# Altium PCB ATT-Light.PcbDoc (part 1 of 2)
Units mm, origin at the board's own origin, x right, y up, seen from the top; angles counter-clockwise.
Board outline 140.3 x 94.24 mm, 2 copper layers (Top Layer, Bottom Layer); 125 components, 78 nets, 490 pads, 126 vias.
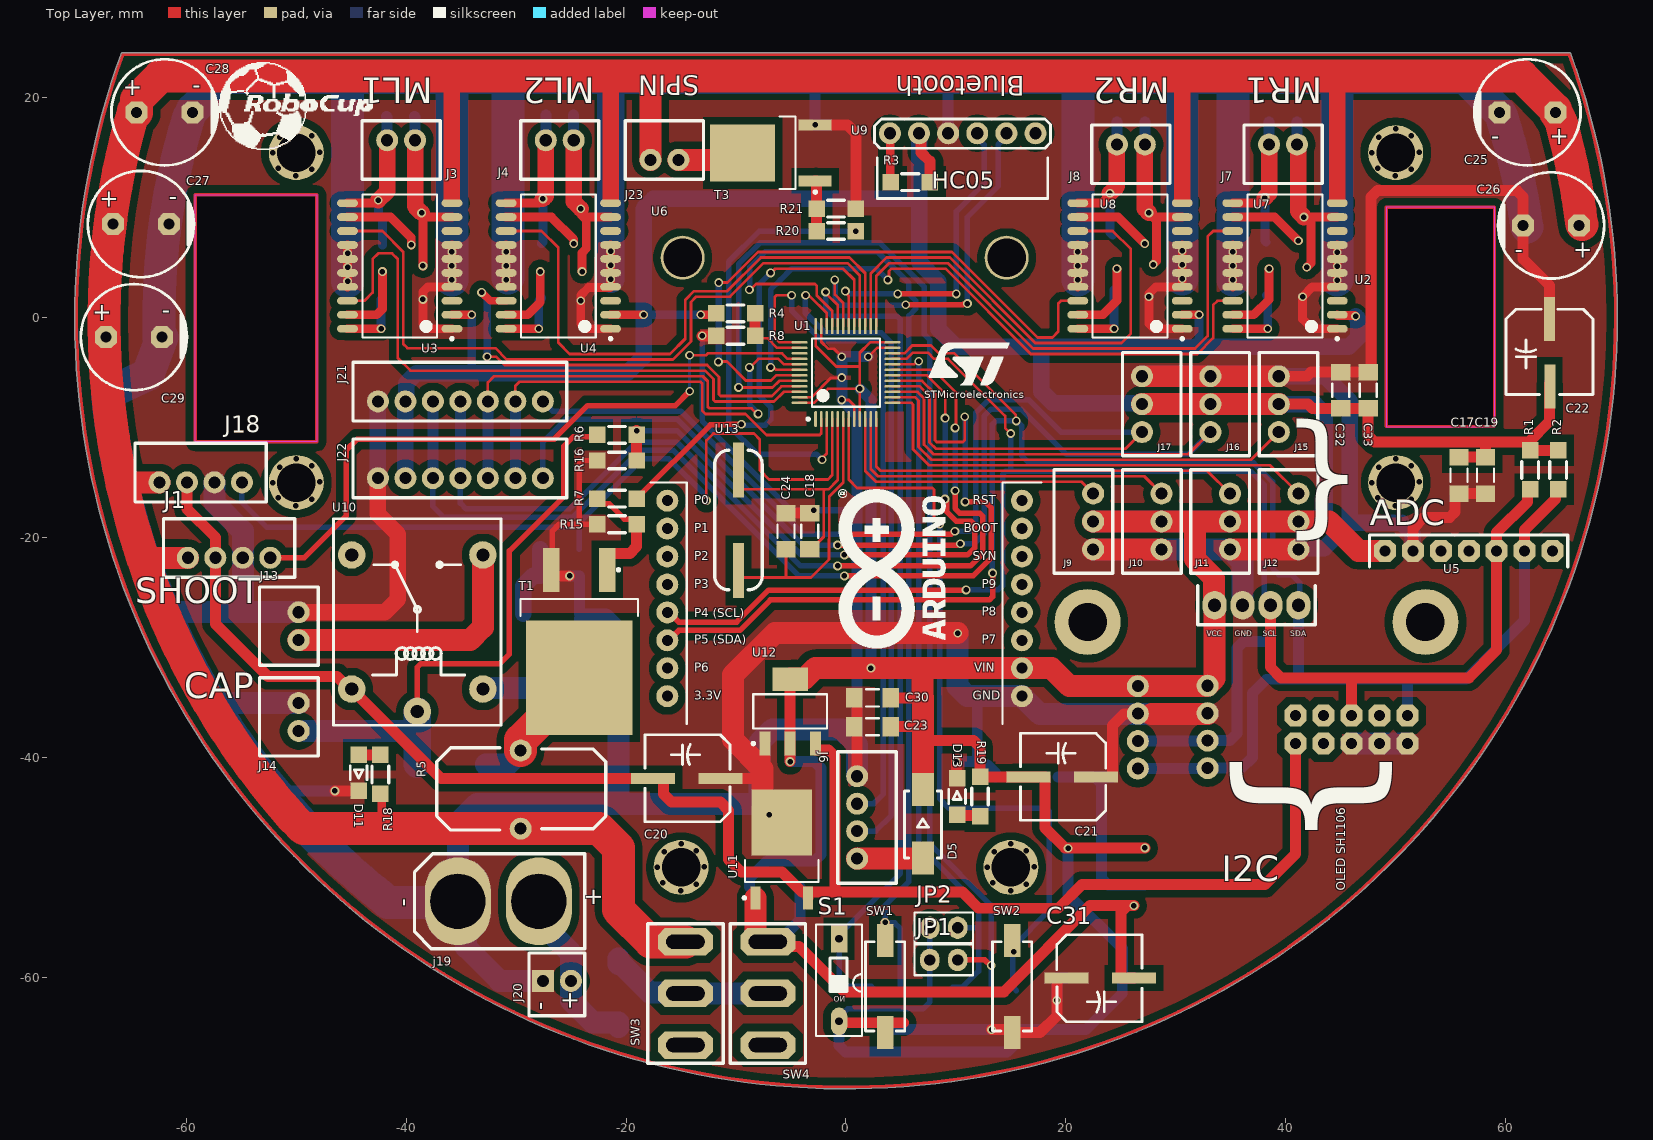
[diagram p0: Top Layer view]
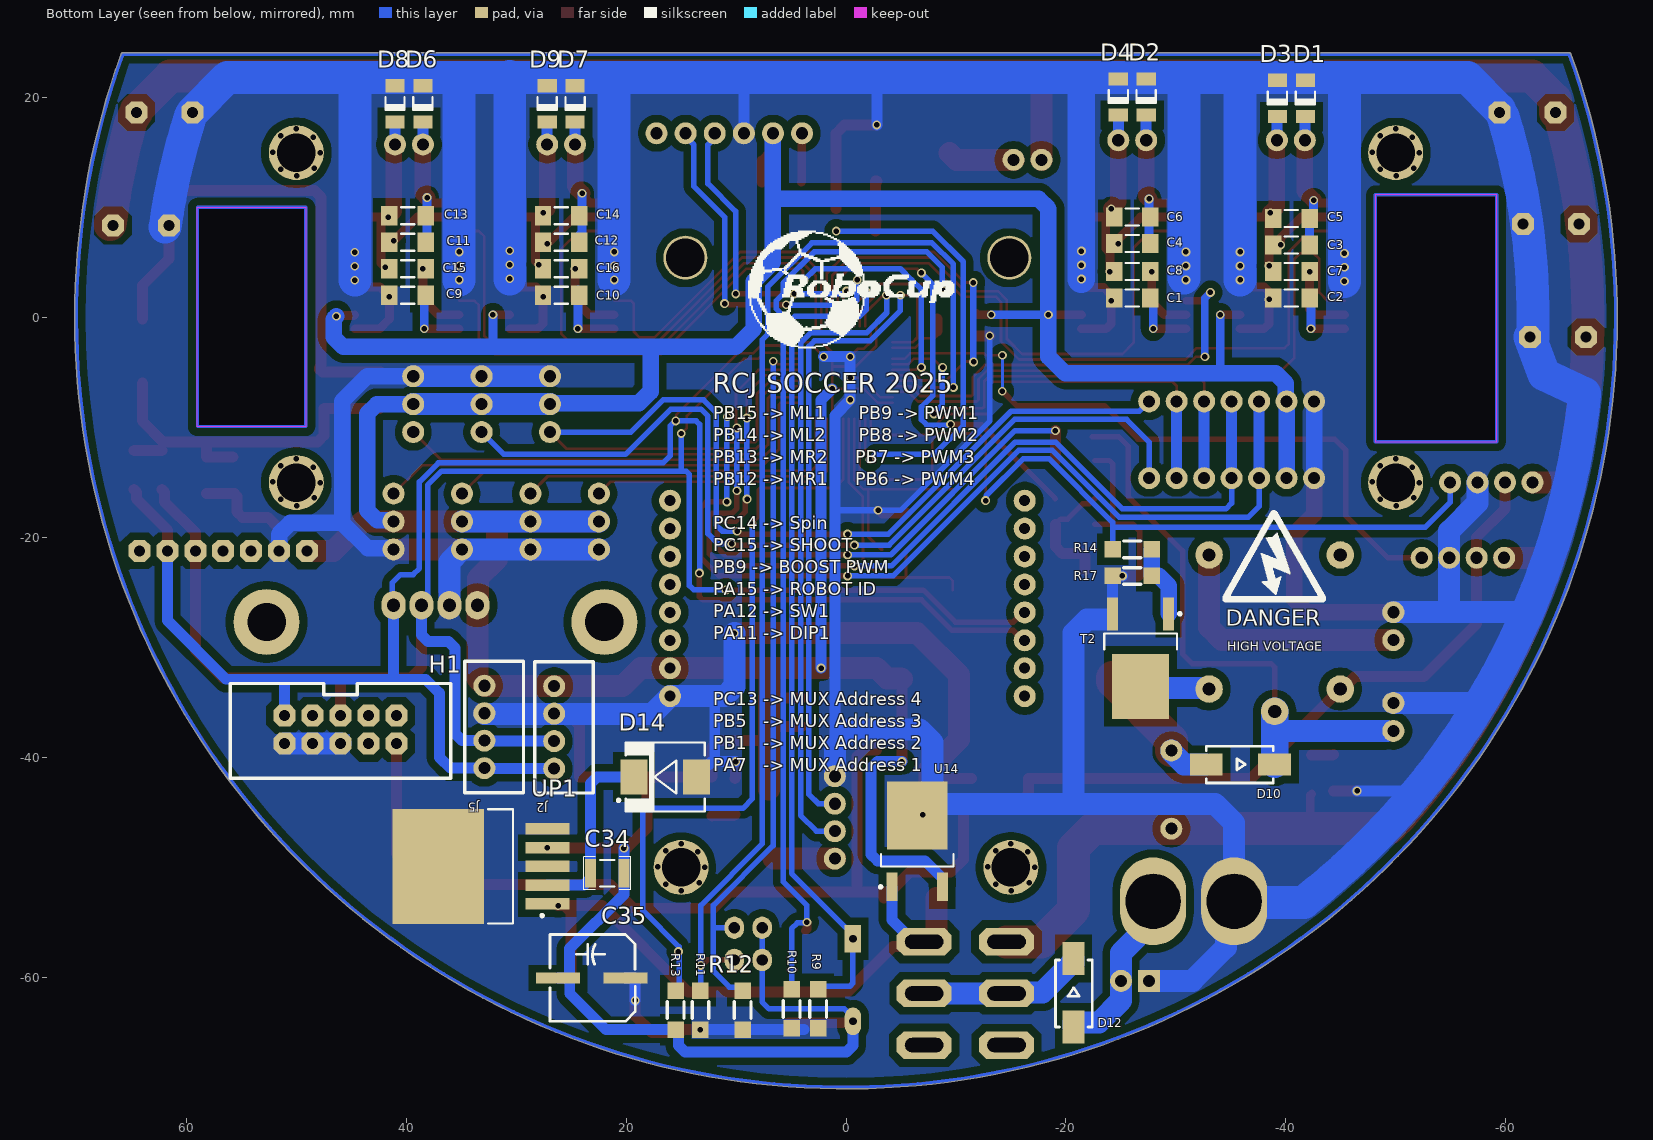
[diagram p1: Bottom Layer view, seen from below]
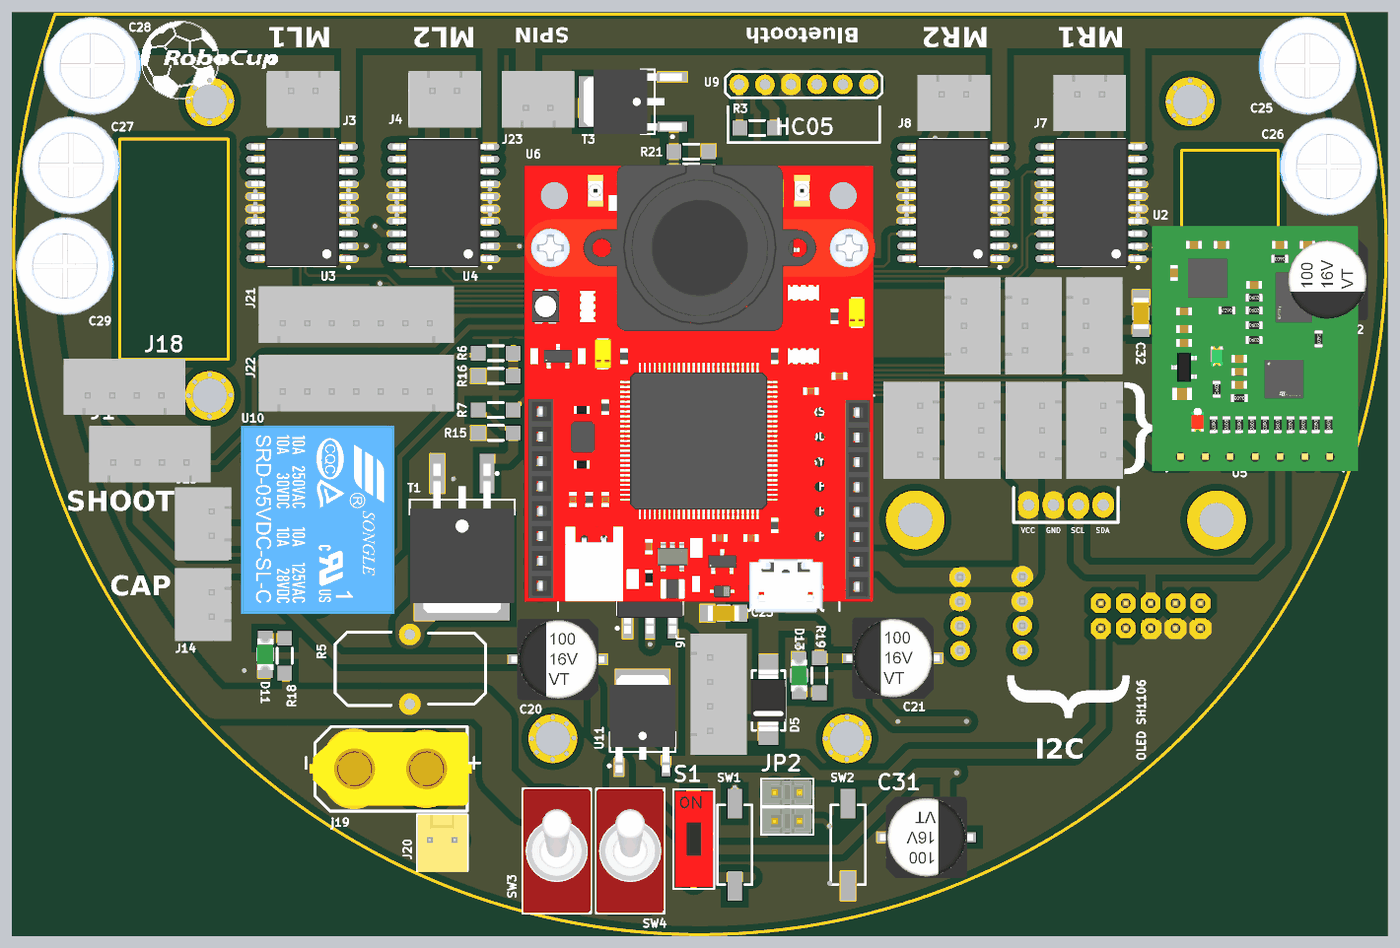
[diagram p3: 3D render of the assembled board from above, using the file's embedded part models]
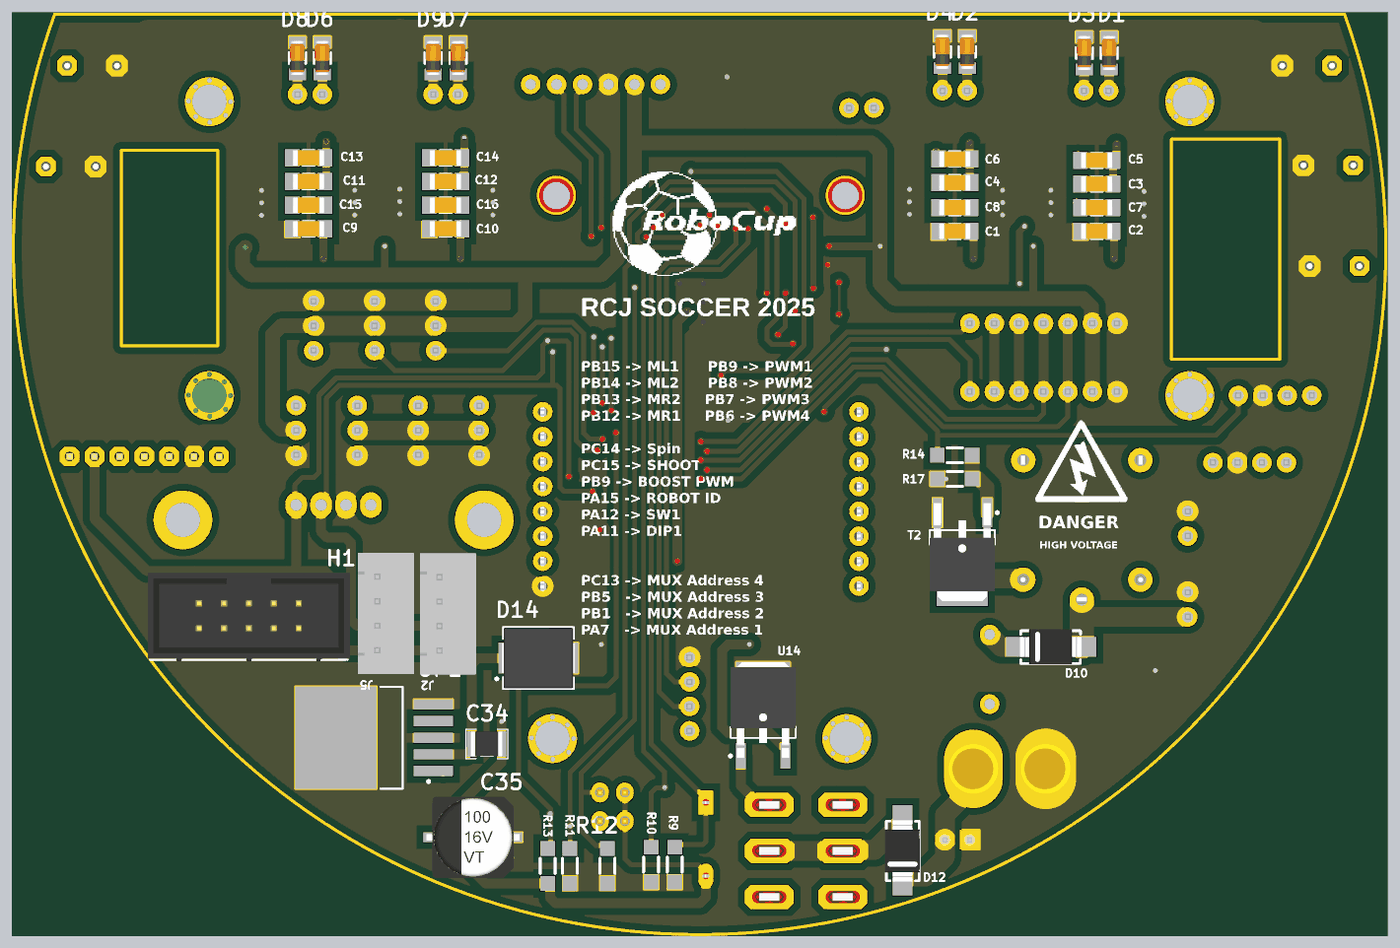
[diagram p4: 3D render of the assembled board from below, using the file's embedded part models]

## Layer stack, top to bottom
Top Solder: solder mask 0.0102, Solder Resist, Dk 3.5
Top Layer: signal copper 0.0356
Dielectric 1: dielectric 0.32, FR-4, Dk 4.8
Bottom Layer: signal copper 0.0356
Bottom Solder: solder mask 0.0102, Solder Resist, Dk 3.5

## Board outline
-65.92,23.993 ccw(c0,0) 70.15,0 ccw(c0,0) 65.92,23.993 ccw(c65.778,23.941) 65.778,24.092 -65.778,24.092 ccw(c-65.778,23.941)
cut-out: 49.149,-9.906 58.987,-9.906 58.987,10.033 49.149,10.033
cut-out: -59.182,-11.303 -59.182,11.176 -48.133,11.176 -48.133,-11.303

## Design rules (kind name [scope] priority, off if disabled: settings)
Clearance [All] p1: gap=0.7 ignorepadtopadclearanceinfootprint=FALSE except(0: Arc-Hole Track-Hole SMDPad-Hole THPad-Hole Via-Hole Fill-Hole Poly-Hole Region-Hole Text-Hole; 0.25: Arc-Arc Arc-Track Arc-SMDPad Track-Track Track-SMDPad SMDPad-SMDPad; 0.254: Arc-THPad Arc-Via Arc-Text Track-THPad Track-Via Track-Text SMDPad-THPad SMDPad-Via SMDPad-Text THPad-THPad THPad-Via THPad-Text Via-Via Via-Text Fill-Text Poly-Text Region-Text Text-Text)
ComponentClearance [All] p1 off: gap=0.254 collisioncheckmode=3 verticalgap=0.254 showdistances=FALSE
Height [All] p1 off: minheight=0 maxheight=25.4 prefheight=12.7
PlaneConnect [All] p1: planeconnectstyle=Direct reliefexpansion=0.508 reliefentries=4 reliefconductorwidth=0.254 reliefairgap=0.254
PolygonConnect [All] p1: connectstyle=Direct reliefconductorwidth=0.254 reliefentries=4 polygonreliefangle="90 Angle" airgapwidth=0.254
RoutingVias [All] p1: holewidth=0.5 width=0.8 viastyle="Through Hole" minholewidth=0.5 minwidth=0.5 maxholewidth=0.5 maxwidth=1
SolderMaskExpansion [All] p1: expansion=0.102 istentingtop=FALSE
SupplyNets "Schematic Supply Nets_3" [InNet('+5')] p1: voltage=0.000
SupplyNets "Schematic Supply Nets_2" [InNet('VCC')] p2: voltage=0.000
SupplyNets "Schematic Supply Nets_1" [InNet('+12')] p3: voltage=0.000
SupplyNets "Schematic Supply Nets" [InNet('GND')] p4: voltage=0.000
Width [All] p1: maxlimit=5 minlimit=0.25 preferedwidth=1
27 further rules are at their usual default settings.

## Classes and differential pairs
component class ATT-Light: C1 C2 C3 C4 C5 C6 C7 C8 C9 C10 C11 C12 C13 C14 C15 C16 C17 C18 C19 C20 C21 C22 C23 C24 C25 C26 C27 C28 C29 C30 C31 C32 C33 C34 C35 D1 D2 D3 D4 D5 D6 D7 D8 D9 D10 D11 D12 D13 D14 H1 J1 J2 J3 J4 J5 J6 J7 J8 J9 J10 J11 J12 J13 J14 J15 J16 J17 J18 j19 J20 J21 J22 J23 JP1 JP2 R1 R2 R3 R4 R5 R6 R7 R8 R10 R11 R12 R13 R14 R15 R16 R17 R18 R19 R20 R21 S1 SW2 SW4 T1 T2 T3 U1 U2 U3 U4 U5 U6 U7 U8 U9 U10 U11 U12 U13 U14 UP1

## Components (designator, comment, footprint, x,y, rotation, side; value= is the part's Value field where it differs from the comment)
C1 "100nF" CAP1206 -26.035,1.778 r0 bottom locked
C2 "100nF" CAP1206 -40.513,1.778 r0 bottom locked
C3 "100nF" CAP1206 -40.513,6.604 r180 bottom locked
C4 "100nF" CAP1206 -26.035,6.731 r180 bottom locked
C5 "100nF" CAP1206 -40.513,9.017 r180 bottom locked
C6 "100nF" CAP1206 -26.035,9.144 r180 bottom locked
C7 "100nF" CAP1206 -40.513,4.191 r180 bottom locked
C8 "100nF" CAP1206 -26.035,4.191 r180 bottom locked
C9 "100nF" CAP1206 39.878,2.032 r0 bottom locked
C10 "100nF" CAP1206 25.908,2.032 r0 bottom locked
C11 "100nF" CAP1206 39.878,6.858 r180 bottom locked
C12 "100nF" CAP1206 25.908,6.858 r180 bottom locked
C13 "100nF" CAP1206 39.878,9.271 r180 bottom locked
C14 "100nF" CAP1206 25.908,9.271 r180 bottom locked
C15 "100nF" CAP1206 39.878,4.445 r180 bottom locked
C16 "100nF" CAP1206 25.908,4.445 r180 bottom locked
C17 "CAP" CAP1206 55.753,-14.351 r90 top
C18 "CAP" CAP1206 -3.302,-19.431 r90 top locked
C19 "CAP" CAP1206 58.166,-14.351 r90 top
C20 "CAP" "CAP SMD 100uF 16V" -14.478,-41.91 r180 top locked
C21 "CAP" "CAP SMD 100uF 16V" 19.685,-41.783 r180 top locked
C22 "CAP" "CAP SMD 100uF 16V" 64.008,-3.175 r270 top
C23 "CAP" CAP1206 2.413,-37.211 r0 top locked
C24 "CAP" CAP1206 -5.461,-19.431 r90 top locked
C25 "1000uF" "CAP 5x10x13 black" 61.976,18.669 r0 top locked
C26 "1000uF" "CAP 5x10x13 black" 64.135,8.382 r0 top locked
C27 "1000uF" "CAP 5x10x13 black" -64.135,8.509 r180 top locked
C28 "1000uF" "CAP 5x10x13 black" -61.976,18.669 r180 top locked
C29 "1000uF" "CAP 5x10x13 black" -64.77,-1.778 r180 top locked
C30 "CAP" CAP1206 2.413,-34.586 r0 top locked
C31 "CAP" "CAP SMD 100uF 16V" 23.114,-60.071 r0 top
C32 "CAP" CAP1206 44.994,-6.604 r270 top locked
C33 "CAP" CAP1206 47.498,-6.604 r270 top locked
C34 "100 UH (1210)" IND1210 21.717,-50.546 r180 bottom value=1u
C35 "CAP" "CAP SMD 100uF 16V" 23.114,-60.071 r0 bottom
D1 "1N4148" "Diode 1n4148 SMD" -41.783,21.588 r270 bottom
D2 "1N4148" "Diode 1n4148 SMD" -27.305,21.715 r270 bottom
D3 "1N4148" "Diode 1n4148 SMD" -39.243,21.588 r270 bottom
D4 "1N4148" "Diode 1n4148 SMD" -24.765,21.715 r270 bottom
D5 "DIODE" Diode 6.985,-46.101 r90 top locked
D6 "1N4148" "Diode 1n4148 SMD" 38.481,21.08 r270 bottom
D7 "1N4148" "Diode 1n4148 SMD" 24.638,21.08 r270 bottom
D8 "1N4148" "Diode 1n4148 SMD" 41.021,21.08 r270 bottom
D9 "1N4148" "Diode 1n4148 SMD" 27.178,21.08 r270 bottom
D10 "DIODE" Diode -35.814,-40.64 r180 bottom locked
D11 "LED" "LED GREEN 1206" -44.323,-41.402 r270 top
D12 "DIODE" Diode -20.701,-61.468 r90 bottom locked
D13 "LED" "LED GREEN 1206" 10.109,-43.561 r90 top locked
D14 "1n5822" DO-214AB(SMC) 16.439,-41.783 r0 bottom
H1 "IDC" "IDC 5x2" 45.847,-37.846 r0 bottom
J1 "XH4" "XH 4PIN" -56.111,-20.955 r0 top
J2 "XH4" "XH 4PIN" 25.654,-37.274 r270 bottom
J3 "XH2" "XH 2pin" -40.462,15.24 r180 top locked
J4 "XH2" "XH 2pin" -26.035,15.24 r180 top locked
J5 "XH4" "XH 4PIN" 32.004,-37.234 r270 bottom
J6 "XH4" "XH 4PIN" 1.905,-45.466 r270 top locked
J7 "XH2" "XH 2pin" 39.751,14.859 r180 top
J8 "XH2" "XH 2pin" 25.908,14.859 r180 top locked
J9 "XH3" "XH 3PIN" 21.59,-18.542 r90 top locked
J10 "XH3" "XH 3PIN" 27.813,-18.542 r90 top locked
J11 "XH3" "XH 3PIN" 34.036,-18.542 r90 top locked
J12 "XH3" "XH 3PIN" 40.259,-18.542 r90 top locked
J13 "XH2" "XH 2pin" -50.673,-28.067 r90 top
J14 "XH2" "XH 2pin" -50.673,-36.322 r90 top
J15 "XH3" "XH 3PIN" 40.251,-7.874 r270 top locked
J16 "XH3" "XH 3PIN" 34.03,-7.874 r270 top locked
J17 "XH3" "XH 3PIN" 27.81,-7.874 r270 top locked
J18 "XH4" "XH 4PIN" -58.691,-14.097 r0 top
j19 "XT60" XT60 -30.099,-53.086 r270 top locked
J20 "H2" "H2 MOLEX" -26.289,-60.706 r270 top locked
J21 "XH7" "XH 7PIN" -35.052,-9.144 r0 top locked
J22 "XH7" "XH 7PIN" -35.052,-16.129 r0 top locked
J23 "XH2" "XH 2pin" -16.51,15.24 r0 top locked
JP1 "Jumper" "Jumper Small - 2.54 - GRAY" 8.89,-58.42 r180 top
JP2 "Jumper" "Jumper Small - 2.54 - GRAY" 8.89,-55.499 r180 top
R1 "10K" RES1206 62.23,-13.843 r90 top
R2 "10K" RES1206 64.77,-13.843 r90 top
R3 "RES" RES1206 5.842,12.319 r180 top locked
R4 "10K" RES1206 -10.033,0.381 r180 top locked
R5 "100mH" inductor -29.718,-42.926 r90 top locked
R6 "10K" RES1206 -20.828,-10.666 r180 top locked
R7 "100" RES1206 -20.828,-16.468 r180 top locked
R8 "10K" RES1206 -10.033,-1.651 r0 top locked
R9 "10K" RES1206 2.54,-62.865 r270 bottom
R10 "10K" RES1206 4.953,-62.865 r270 bottom
R11 "10K" RES1206 13.237,-62.992 r270 bottom locked
R12 "10K" RES1206 9.398,-62.992 r270 bottom
R13 "10K" RES1206 15.491,-62.992 r90 bottom locked
R14 "100" RES1206 -26.035,-21.082 r0 bottom locked
R15 "10K" RES1206 -20.828,-18.796 r0 top locked
R16 "10K" RES1206 -20.828,-12.997 r0 top locked
R17 "10K" RES1206 -26.035,-23.498 r0 bottom locked
R18 "1K" RES1206 -42.355,-41.548 r270 top
R19 "1K" RES1206 12.192,-43.561 r90 top locked
R20 "100" RES1206 -0.889,7.874 r0 top locked
R21 "10K" RES1206 -0.889,9.906 r0 top locked
S1 "DS1" "DIP Switch x1" -0.635,-56.508 r180 top
SW1 "Switch" pushbutton 3.556,-60.833 r90 top
SW2 "Switch" pushbutton 15.113,-60.833 r90 top locked
SW3 "SW" "SPDT Switch" -14.732,-61.468 r0 top locked
SW4 "SW" "SPDT Switch" -7.239,-61.468 r0 top locked
T1 "IRF540" IRF540S -24.257,-29.591 r270 top locked
T2 "FDD" FDD6690A -26.797,-30.988 r270 bottom locked
T3 "FDD" FDD6690A -6.848,14.986 r180 top locked
U1 "STM32F103C8T6" STM32F103C8T6 0,-5 r90 top locked
U2 "TDAxis12" TDAxis12 56.638,-10.116 r0 top
U3 "L6201" L6201 -40.589,4.699 r180 top locked
U4 "L6201" L6201 -26.162,4.699 r180 top locked
U5 "OLED" "OLED SH1106" 37.338,-41.91 r0 top
U6 "OpenMV" OpenMV 0,-15 r0 top locked
U7 "L6201" L6201 39.929,4.699 r180 top locked
U8 "L6201" L6201 25.834,4.699 r180 top locked
U9 "BT" HC05 10.597,11.464 r0 top locked
U10 "RELAY" "Relay 5V 10A" -38.989,-27.686 r270 top locked
U11 "7805" "7805 (SOT-252)" -5.842,-48.387 r90 top locked
U12 "1117" AMS1117 -5.08,-35.814 r90 top locked
U13 "Oscilator" "Crystal Oscilator" -9.779,-18.415 r90 top locked
U14 "LF33" LF33 -6.477,-47.625 r90 bottom locked
UP1 "LM2576-ADJ" "LM2576 SMD" 32.131,-49.911 r180 bottom
? "Comment" SCREW -50,-15 r0 top locked
? "Comment" SCREW -50,15 r0 top locked
? "Comment" SCREW -15,-50 r0 top locked
? "Comment" SCREW 15,-50 r0 top locked
? "Comment" SCREW 50,-15 r0 top locked
? "Comment" SCREW 50,15 r0 top locked

## Footprints (in the part's own frame and the unit in brackets; to place one, negate y for a bottom-side part, rotate by r counter-clockwise, add the part's x,y. Pads: shape width x height; smd on the part's side, far side on the other; paste and mask are expansions set on the pad)
"7805 (SOT-252)" [mm] "D-PAK, 3-Pads, Body 6.25x6.71mm (max), IPC Medium Density"
  rect 2.1x0.9 smd: 1(-4.4,2.4) 3(-4.4,-2.4)
  rect 6x5.5 smd: 4(2.45,0)
  silkscreen extent -4.52,-3.35 -0.95,3.52, body extent -5.06,-3.35 4.85,3.35, height 2.45
AMS1117 [mm] "SOT223, 4-Leads, Body 6.30x7.00mm (avg), Pitch 2.30mm, IPC Medium Density"
  rect 2.15x1 smd: 1(-2.925,2.3) 2(-2.925,0) 3(-2.925,-2.3)
  rect 2.15x3.25 smd: 4(2.925,0)
  silkscreen extent -3.05,-3.35 1.55,3.47, body extent -3.5,-3.35 3.5,3.35, height 1.65
CAP1206 [mm] "Chip Capacitor, 2-Leads, Body 3.20x1.60mm, IPC Medium Density"
  rect 1.5x1.75 smd: 1(-1.651,0) 2(1.651,0)
  silkscreen extent -0.6,-0.77 0.6,0.77, body extent -1.6,-0.8 1.6,0.8, height 1
"CAP 5x10x13 black" [mm]
  oct 2x2 hole 1: 1(-2.54,0) 2(2.54,0)
  silkscreen extent -4.83,-4.83 4.83,4.83, body extent -5,-5 5,5, height 13.1
"CAP SMD 100uF 16V" [mm]
  rect 4x1 smd: 1(-3.048,0) 2(3.07,0.003)
  silkscreen extent -3.94,-3.97 3.81,3.94, body extent -4.75,-4.15 4.75,4.15, height 10.51
"Crystal Oscilator" [mm]
  rect 5x1 smd: 1(-4.572,0) 2(4.572,0)
  silkscreen extent -6.35,-2.16 6.35,2.16, body extent -6.5,-2.35 6.5,2.35, height 4.21
Diode [mm]
  rect 3x2 smd: 1(-3.048,0) 2(3.175,0)
  silkscreen extent -3.06,-1.69 3.05,1.65, body extent -3.12,-1.78 3.12,1.78, height 2.26
"Diode 1n4148 SMD" [mm] "Mini MELF SOD-80"
  rect 1.2x1.75 smd: 1(0,0) 2(3.3,0)
  silkscreen extent 1.04,-0.88 2.22,0.87, body extent -0.13,-0.75 3.37,0.75, height 1.55
"DIP Switch x1" [mm] "Switch DIP 1 way flat slide Thru-Hole-Design:Ali Hafizi"
  rect 1.5x2.5 hole 0.7: 1(0,0)
  oval 1.5x2.5 hole 0.7: 2(0,7.5)
  silkscreen extent -2.09,-1.32 2.08,8.82, body extent -1.94,-1.11 1.89,8.64, height 7.33
DO-214AB(SMC) [mm] "Molded Diode, 2-Leads, Body 6/85x5/90mm, IPC Medium Density DESIGNER ABBAS BASEREH"
  rect 2.45x3.15 smd: 1(-2.85,0) 2(2.85,0)
  silkscreen extent -3.6,-3.2 4.38,3.15, body extent -3.77,-3.11 3.77,3.11, height 2.62
FDD6690A [mm] "D-PAK, 3-Pads, Body 5.85x6.66mm (max), IPC Medium Density"
  rect 3x1 smd: 1(-4.05,2.54) 3(-4.05,-2.54)
  rect 5.9x5.2 smd: 4(2.55,0)
  silkscreen extent -4.17,-3.3 -0.8,3.69, body extent -5,-3.3 5,3.3, height 3.03
"H2 MOLEX" [mm]
  round 2 hole 1.1: 1(-0.381,1.27)
  rect 2x2 hole 1.1: 2(-0.381,-1.27)
  silkscreen extent -2.92,-2.54 2.79,2.54, body extent -2.9,-2.54 2.9,2.54, height 11.24
HC05 [mm]
  round 2 hole 1.1: 1(-6.605,5.3) 2(-3.956,5.3) 3(-1.308,5.3) 4(1.341,5.3) 5(3.99,5.3) 6(6.639,5.3)
  silkscreen extent -8,-0.64 8,6.6, body extent -8,-1 8,5.55, height 39.5
"IDC 5x2" [mm]
  oct 2x2 hole 1: 1(-4.953,-1.651) 2(-4.953,0.889) 3(-2.413,-1.651) 4(-2.413,0.889) 5(0.127,-1.651) 6(0.127,0.889) 7(2.667,-1.651) 8(2.667,0.889) 9(5.207,-1.651) 10(5.207,0.889)
  silkscreen extent -9.91,-4.57 10.16,4.06, body extent -10.17,-4.78 10.43,4.32, height 9.3
IND1210 [mm] "Chip Inductor, 2-Leads, Body 3/20x2/50mm, IPC Medium Density DESIGNER:ABBAS BASEREH"
  rect 0.97x2.62 smd: 1(-1.52,0) 2(1.52,0)
  silkscreen extent -2.15,-1.5 2.15,1.5, body extent -1.63,-1.28 1.63,1.28, height 0.55
inductor [mm]
  round 2 hole 1.1: 1(-3.556,-0.127) 2(3.556,-0.127)
  silkscreen extent -3.68,-7.87 3.81,7.49, body extent -4.15,-8.42 4.15,8.17, height 16.29
IRF540S [mm] "D2-PAK, 3-Pads, Body 7.93x8.70mm (max), IPC Medium Density"
  rect 4x1.5 smd: 1(-6.65,2.54) 3(-6.65,-2.54)
  rect 10.4x9.7 smd: 4(3.15,0)
  silkscreen extent -6.77,-5.35 -2.45,5.35, body extent -7.65,-5.33 7.6,5.33, height 5.08
"Jumper Small - 2.54 - GRAY" [mil]
  oval 70x80 hole 40: 1(-50,0) 2(50,0)
  silkscreen extent -105,-55 105,55, body extent -100,-50 100,50, height 337
L6201 [mm] "SOP, 20-Leads, Body 12.80x7.50mm, Pitch 1.27mm, IPC Medium Density"
  oval 1.9x0.7 smd: 1(-4.75,5.715) 2(-4.75,4.445) 3(-4.75,3.175) 4(-4.75,1.905) 5(-4.75,0.635) 6(-4.75,-0.635) 7(-4.75,-1.905) 8(-4.75,-3.175) 9(-4.75,-4.445) 10(-4.75,-5.715) 11(4.75,-5.715) 12(4.75,-4.445) 13(4.75,-3.175) 14(4.75,-1.905) 15(4.75,-0.635) 16(4.75,0.635) 17(4.75,1.905) 18(4.75,3.175) 19(4.75,4.445) 20(4.75,5.715)
  silkscreen extent -4.88,-6.5 3.4,6.74, body extent -5.16,-6.5 5.16,6.5, height 2.5
"LED GREEN 1206" [mm]
  rect 1.5x1.5 smd: 1(-1.651,0) 2(1.651,0)
  silkscreen extent -0.64,-0.76 0.64,0.76, body extent -1.63,-0.83 1.64,0.82, height 0.9
LF33 [mm] "D-PAK, 3-Pads, Body 6.20x6.66mm (max), IPC Medium Density"
  rect 2.6x1 smd: 1(-4.15,2.28) 3(-4.15,-2.28)
  rect 6.2x5.5 smd: 4(2.35,0)
  silkscreen extent -4.27,-3.3 -1.15,3.46, body extent -4.32,-3.3 5.4,3.3, height 2.5
"LM2576 SMD" [mm]
  rect 4x1.05 smd: 1(4.962,-3.4) 2(4.962,-1.7) 3(4.962,0) 4(4.962,1.7) 5(4.962,3.4)
  rect 8.3x10.45 smd: 6(-4.963,0)
  silkscreen extent -0.41,-5.2 4.61,5.2, body extent -7.56,-5.2 1.84,5.2, height 4.65
"OLED SH1106" [mm]
  oval 2.2x2.6 hole 1.2: 1(-3.81,15.748) 2(-1.27,15.748) 3(1.27,15.748) 4(3.81,15.748)
  round 6 hole 3.5: ""(-15.367,14.224) ""(15.367,14.224)
  silkscreen extent -5.33,13.97 5.33,17.53, body extent -18,-17 18,17, height 11.6
OpenMV [mm]
  round 2 hole 1: 1(-16.256,-1.651) 2(-16.256,-4.191) 3(-16.256,-6.731) 4(-16.256,-9.271) 5(-16.256,-11.811) 6(-16.256,-14.351) 7(-16.256,-16.891) 8(-16.256,-19.431) 9(16.002,-19.431) 10(16.002,-16.891) 11(16.002,-14.351) 12(16.002,-11.811) 13(16.002,-9.271) 14(16.002,-6.731) 15(16.002,-4.191) 16(16.002,-1.651)
  round 4 hole 3.5: 17(14.605,20.447) 18(-14.859,20.447)
  silkscreen extent -17.78,-21.97 17.78,0, body extent -17.92,-22.12 17.9,23.58, height 38.95
pushbutton [mm]
  rect 3x1.5 smd: 1(-4.191,0) 2(4.191,0)
  silkscreen extent -4.06,-1.78 4.06,1.78, body extent -4.17,-1.82 4.17,1.82, height 4.25
"Relay 5V 10A" [mm]
  round 2.5 hole 1.2: 1(-6.096,5.969) 2(-6.096,-5.969) 3(6.096,-5.969) 4(6.096,5.969) 5(8.128,0)
  silkscreen extent -9.4,-7.62 9.4,7.62, body extent -9.6,-7.8 9.6,7.8, height 15.9
RES1206 [mm]
  rect 1.5x1.5 smd: 1(-1.778,0) 2(1.778,0)
  silkscreen extent -0.76,-0.76 0.76,0.76, body extent -1.58,-0.82 1.58,0.82, height 0.53
SCREW [mm]
  round 5 hole 3.5: 1(0,0)
  round 0 hole 0.5: ""(-2.159,0) ""(-1.651,-1.397) ""(-1.524,1.397) ""(-0.031,-2.11) ""(0,2.159) ""(1.397,-1.524) ""(1.397,1.524) ""(2.128,0.059)
"SPDT Switch" [mm]
  oct 5x2.5 hole 1.3 slot 3.5 at 0 deg: 1(0.127,4.699) 2(0.127,0) 3(0.127,-4.699)
  silkscreen extent -3.3,-6.35 3.56,6.35, body extent -3.3,-6.35 3.56,6.35, height 28.65
STM32F103C8T6 [mm] "TSQFP, 48-Leads, Body 7.00x7.00mm, Pitch 0.50mm, IPC Medium Density"
  oval 1.45x0.254 smd: 1(-4.224,2.762)
  oval 1.45x0.25 smd: 2(-4.225,2.25) 3(-4.225,1.75) 4(-4.225,1.25) 5(-4.225,0.75) 6(-4.225,0.25) 7(-4.225,-0.25) 8(-4.225,-0.75) 9(-4.225,-1.25) 10(-4.225,-1.75) 11(-4.225,-2.25) 12(-4.225,-2.75) 25(4.225,-2.75) 26(4.225,-2.25) 27(4.225,-1.75) 28(4.225,-1.25) 29(4.225,-0.75) 30(4.225,-0.25) 31(4.225,0.25) 32(4.225,0.75) 33(4.225,1.25) 34(4.225,1.75) 35(4.225,2.25) 36(4.225,2.75)
  oval 0.25x1.45 smd: 13(-2.75,-4.225) 14(-2.25,-4.225) 15(-1.75,-4.225) 16(-1.25,-4.225) 17(-0.75,-4.225) 18(-0.25,-4.225) 19(0.25,-4.225) 20(0.75,-4.225) 21(1.25,-4.225) 22(1.75,-4.225) 23(2.25,-4.225) 24(2.75,-4.225) 37(2.75,4.225) 38(2.25,4.225) 39(1.75,4.225) 40(1.25,4.225) 41(0.75,4.225) 42(0.25,4.225) 43(-0.25,4.225) 44(-0.75,4.225) 45(-1.25,4.225) 46(-1.75,4.225) 47(-2.25,4.225) 48(-2.75,4.225)
  silkscreen extent -4.35,-3.1 3.1,3.57, body extent -4.5,-4.5 4.5,4.5, height 1.6
TDAxis12 [mm]
  oct 2x2 hole 1: 1(-7.615,-11.093) 2(-5.075,-11.093) 3(-2.536,-11.093) 4(0.004,-11.093) 5(2.544,-11.093) 6(5.084,-11.093) 7(7.624,-11.093)
  silkscreen extent -9.02,-12.57 9.02,-9.65, body extent -10.5,-12.57 10.5,12.43, height 5.39
"XH 2pin" [mm]
  round 2 hole 1.1: 1(-1.27,-0.889) 2(1.27,-0.889)
  silkscreen extent -3.56,-2.67 3.56,2.67, body extent -3.7,-2.88 3.7,2.88, height 7
"XH 3PIN" [mm]
  round 2 hole 1.1: 1(-2.54,-0.889) 2(0,-0.889) 3(2.54,-0.889)
  silkscreen extent -4.7,-2.67 4.7,2.67, body extent -4.95,-2.88 4.95,2.88, height 7
"XH 4PIN" [mm]
  round 2 hole 1.1: 1(-3.753,-0.889) 2(-1.253,-0.889) 3(1.247,-0.889) 4(3.747,-0.889)
  silkscreen extent -5.97,-2.67 5.97,2.67, body extent -6.2,-2.88 6.2,2.88, height 7
"XH 7PIN" [mm]
  round 2 hole 1.1: 1(-7.523,1.524) 2(-5.023,1.524) 3(-2.523,1.524) 4(-0.023,1.524) 5(2.477,1.524) 6(4.977,1.524) 7(7.477,1.524)
  silkscreen extent -9.78,-0.25 9.65,5.08, body extent -9.95,-0.46 9.95,5.29, height 7
XT60 [mm]
  oval 8x6 hole 5: 1(0,2.159) 2(0,-5.207)
  silkscreen extent -4.32,-9.14 4.32,6.35, body extent -3.75,-9.72 3.75,6.83, height 16

## Part data
C1 C2 C3 C4 C5 C6 C7 C8 C9 C10 C11 C12 C13 C14 C15 C16 C17 C18 C19 C23 C24 C30 C32 C33: library part CAP1206, "Capacitor SMD 1206"
C20 C21 C22 C31 C35: library part "CAP Electrolit SMD", "Capacitor Electrolit SMD"
C25 C26 C27 C28 C29: library part "Cap Electrolyte", "CAP DIP"
C34: library part "INDUCTOR SMD PACKAGE", "TOTAL INDUCTOR SMD PACK", Data=2017-3-10, Desc.="INDUCTOR  SMD TOTAL PACKAGES", Designer="Abbas Basereh"
D1 D2 D3 D4 D6 D7 D8 D9: library part "1N4148 SMD", "General Semicoductor"
D5 D10 D12: library part Diode
D11 D13: library part "LED SMD 1206", "LED SMD 1206"
D14: library part "1N5822 SMD", "Schottky Rectifiers", Manufacturer="ON Semiconductor/Fairchild", Data=16-12-2016, Designer="Abbas Basereh", Link=https://www.aliexpress.com/item/Free-shipping-100pcs-1n5822-sma-smd-do-214ac-Schottky-diode-ss34/32337482329.html?spm=2114.01010208.3.1.zLZDsP&ws_ab_test=searchweb0_0,searchweb201602_4_10065_10068_10084_10083_10080_10082_10081_10060_10061_10062_10056_10055_10054_10059_10099_10078_10079_427_10073_10103_10102_10096_10052_10050_10051,searchweb201603_4&btsid=6e50dc92-ac69-45bc-a19e-209af19ce602, Part. No=SS34
H1: library part "IDC BOX 5x2", "IDC BOX 5x2"
J1 J2 J5 J6 J18: library part "XH 4PIN", "XH Connector 4pins"
J3 J4 J7 J8 J13 J14 J23: library part "XH 2PIN", "XH Connector 2pins"
J9 J10 J11 J12 J15 J16 J17: library part "XH 3PIN", "XH Connector 3pins"
j19: "XT60 Power Connector"
J20: library part "H2 MOLEX", "molex connector"
J21 J22: library part "XH 7Pin", "XH Connector 7pins"
R1 R2 R3 R4 R6 R7 R8 R9 R10 R11 R12 R13 R14 R15 R16 R17 R18 R19 R20 R21: library part RES1206, "RESISTOR SMD"
R5: library part inductor, "SELF INDUCTOR"
S1: library part "DIP Switch 1", "1 BIT DIP Switch"
SW1 SW2: library part pushbutton, "Switch SMD Tact"
SW3 SW4: library part "SPDT Switch", "SPDT Power Switch"
T1: library part IRF540S, "IRF-540 MOSFET N-Chanel"
T2 T3: library part FDD6690A, "FDD6690A MOSFET N-Chanel"
U1: "STM32F103C8T6 / LQFP48"
U2: "Gyroscpoe Sensor"
U5: library part "OLED SH1106", "OLED SH1106 1.3inch"
U6: "OpenMV Camera H7 R2"
U9: library part HC05, "Bluetooth HC05 Module"
U10: library part "Relay 5V 10A"
U11: library part "7805 (SOT-252)", "5v Regulator"
U12: library part AMS1117, "3.3v Regulator"
U13: library part Crystal, "Crystal Oscilator 8MHz"
U14: "3.3V Regulator"
UP1: library part LM2576-Adj, "1.2-50V, 3A variable output step-down switching voltage regulator", Data=16-12-2016, Designer="Abbas Basereh"
JP1 JP2: Company=E.P.I.L, Defualt State=Close, Design Date=2011/11/02

## Via types
v1: diameter 0.8, hole 0.5, Top Layer to Bottom Layer, tented both sides, 126 vias

## Nets (pads, with @x,y where several pads share a name; then routed paths per layer and width w, separated by ;. In a path a pad name is that pad's centre, name@x,y a point inside that pad or via, vN(x,y) a via of type N, cw(c..) or ccw(c..) an arc to the next point about the centre after c; other vN are vias at no path point)
+5: C20.2 H1.2 J1.2 J18.2 U10.3 U11.3 U12.3 | length 154
  Top Layer w1: J18.2@-59.944,-14.986 -59.944,-17.399 -57.364,-19.979 J1.2@-57.364,-21.844 -57.364,-27.853 -52.578,-32.639 -46.294,-32.639 -45.151,-33.782 U10.3@-44.958,-33.782 -36.827,-41.913 C20.2@-17.548,-41.913 -16.617,-41.913 -16.617,-43.327 -15.875,-44.069 -11.43,-44.069 -10.668,-44.831 -10.668,-49.276 -9.525,-50.419 -5.81,-50.419 -3.992,-52.237 -3.492,-52.237 U11.3@-3.442,-52.287 ; U11.3@-3.442,-52.787 U11.3@-3.442,-52.287 ; U12.3@-2.78,-38.739 -2.78,-39.314 -1.602,-39.314 -1.016,-39.9 -1.016,-52.07 ; H1.2@40.894,-38.735 40.894,-48.768 38.1,-51.562 21.463,-51.562 19.304,-53.721 12.065,-53.721 10.581,-52.237 -1.016,-52.237 -3.392,-52.237 U11.3@-3.442,-52.287
  Bottom Layer w1.5: U10.3@-44.958,-33.782 U10.3@-44.767,-33.591
+12: C25.2 C26.2 C27.2 C28.2 C29.2 J1.1 J18.1 J23.1 R5.1 R18.2 SW3.1 U3.10 U4.10 U7.10 U8.10 | length 318.7
  Top Layer w0.8: R18.2@-42.355,-43.326 -42.228,-43.453 -42.228,-46.419 -42.291,-46.482 ; -35.839,21.819 -35.687,21.971 ; -21.463,21.971 -21.412,21.92 ; 30.584,21.948 30.607,21.971 ; 44.679,21.819 44.831,21.971
  Top Layer w1.5: -35.839,10.795 -35.839,21.819 ; -21.412,10.795 -21.412,21.92 ; 30.584,10.795 30.584,21.948 ; 44.679,10.795 44.679,21.819
  Top Layer w2: -65.863,-15.017 -65.831,-14.986 J18.1@-62.444,-14.986 ; -63.963,-21.871 -63.936,-21.844 J1.1@-59.864,-21.844 ; J23.1@-17.78,14.351 -17.78,21.844 ; -16.129,21.844 -16.002,21.971
  Top Layer w3: C28.2@-64.785,18.841 ccw(c0.932,-0.197) -50.369,-45.467 ccw(c0.932,-0.197) -50.306,-45.538 -50.241,-45.603 -49.362,-46.482 -42.228,-46.482 R5.1@-29.591,-46.482 -22.458,-46.482 -20.701,-48.239 -20.701,-53.848 -17.78,-56.769 SW3.1@-14.605,-56.769 ; C28.2@-64.516,18.669 -64.516,19.833 -62.378,21.971 -35.687,21.971 -21.463,21.971 -16.002,21.971 30.607,21.971 44.831,21.971 61.468,21.971 C25.2@64.516,18.923 ; C25.2@64.516,18.669 64.521,18.665 64.578,18.593 cw(c62.225,16.733) 65.118,17.526 cw(c1.164,0.026) C26.2@66.932,8.447
ADC0: J9.3 U1.10 | length 26.3
  Top Layer w0.25: U1.10@1.75,-9.225 1.75,-13.959 2.721,-14.93 21.407,-14.93 J9.3@22.479,-16.002
ADC1: J10.3 U1.11 | length 31.9
  Top Layer w0.25: U1.11@2.25,-9.225 2.25,-13.752 2.928,-14.43 5.358,-14.43 27.13,-14.43 J10.3@28.702,-16.002
ADC2: J11.3 U1.12 | length 37.5
  Top Layer w0.25: U1.12@2.75,-9.225 2.75,-13.545 3.135,-13.93 32.853,-13.93 J11.3@34.925,-16.002
ADC3: J12.3 U1.13 | length 42.7
  Top Layer w0.25: U1.13@4.225,-7.75 5.95,-7.75 6.096,-7.896 6.096,-10.414 6.096,-11.972 7.554,-13.43 9.112,-13.43 38.576,-13.43 J12.3@41.148,-16.002
ADC4: J15.3 U1.14 | length 41
  Top Layer w0.25: U1.14@4.225,-7.25 6.303,-7.25 6.596,-7.543 6.596,-10.207 6.596,-11.765 7.761,-12.93 9.319,-12.93 36.846,-12.93 J15.3@39.362,-10.414
ADC5: J16.3 J22.7 U1.15 | length 118.1
  Top Layer w0.25: U1.15@4.225,-6.75 6.51,-6.75 7.096,-7.336 7.096,-10 7.096,-11.558 7.968,-12.43 9.526,-12.43 31.125,-12.43 J16.3@33.141,-10.414
  Top Layer w0.5: v1(-0.762,-20.686) 10.09,-20.686 10.144,-20.631 10.357,-20.631 v1(10.414,-20.574)
  Bottom Layer w0.5: J22.7@-27.575,-14.605 -27.575,-11.319 -25.515,-9.259 -15.341,-9.259 -3.914,-20.686 v1(-0.762,-20.686) ; v1(10.414,-20.574) 11.629,-20.574 12.561,-19.642 12.561,-8.96 13.208,-8.313 15.933,-8.313 20.066,-12.446 31.109,-12.446 J16.3@33.141,-10.414
ADC6: J17.3 J21.7 U1.16 | length 99.9
  Top Layer w0.25: U1.16@4.225,-6.25 6.717,-6.25 7.596,-7.129 7.596,-11.351 8.175,-11.93 25.405,-11.93 J17.3@26.921,-10.414
  Top Layer w0.5: v1(-0.138,-19.685) 8.846,-19.685 8.858,-19.697 9.559,-19.697 9.825,-19.431 v1(9.906,-19.431)
  Bottom Layer w0.5: J21.7@-27.575,-7.62 -26.686,-8.509 -15.031,-8.509 -3.855,-19.685 v1(-0.138,-19.685) ; v1(9.906,-19.431) 11.248,-19.431 11.811,-18.868 11.811,-8.636 12.954,-7.493 16.637,-7.493 19.558,-10.414 J17.3@26.921,-10.414 J17.3@26.924,-10.414
ADC8: R6.1 R16.2 U1.18 | length 59.7
  Top Layer w0.25: U1.18@4.225,-5.25 7.365,-5.25 9.017,-6.902 v1(9.017,-9.144)
  Top Layer w0.5: v1(-0.138,-21.59) 11.049,-21.59 11.696,-20.943 11.696,-18.823 11.403,-18.53 10.029,-18.53 9.171,-17.672 9.171,-16.76 9.002,-16.591 v1(9.002,-16.51)
  Top Layer w1: R16.2@-19.05,-12.997 R6.1@-19.05,-10.666 ; R6.1@-19.05,-10.541 v1(-19.05,-10.287)
  Bottom Layer w0.5: v1(-19.05,-10.287) -15.374,-10.287 -4.071,-21.59 v1(-0.138,-21.59) ; v1(9.002,-16.51) 9.009,-16.502 9.009,-9.152 v1(9.017,-9.144)
BOOST_CTRL: R7.1 U1.29 | length 41.8
  Top Layer w0.25: v1(-6.858,4.064) -6.818,4.064 -6.437,4.445 -0.254,4.445 0.75,3.441 U1.29@0.75,-0.775
  Top Layer w0.5: R7.1@-19.05,-16.468 -12.344,-9.762 -10.908,-9.762 -10.841,-9.695 v1(-9.508,-9.695)
  Bottom Layer w0.5: v1(-9.508,-9.695) -9.427,-9.695 -9.343,-9.779 -7.366,-9.779 -6.858,-9.271 -6.858,-8.128 -7.874,-7.112 -7.874,3.048 v1(-6.858,4.064)
BOOT0: JP1.1 R11.1 U1.44 | length 106.1
  Top Layer w0.25: v1(-9.764,-6.35) -6.675,-6.35 -6.075,-5.75 U1.44@-4.225,-5.75
  Top Layer w0.5: JP1.1@10.16,-58.42 12.619,-58.42 13.127,-58.928 v1(13.208,-58.928)
  Bottom Layer w0.5: v1(-9.764,-6.35) -9.764,4.858 -7.817,6.805 3.111,6.805 7.132,2.784 7.132,-1.534 7.62,-2.022 7.62,-47.874 13.208,-53.462 v1(13.208,-58.928) 13.208,-61.185 R11.1@13.237,-61.214
BOOT1: JP2.1 R12.1 U1.20 | length 65.5
  Top Layer w0.25: U1.20@4.225,-4.25 6.198,-4.25 6.477,-3.971 v1(6.619,-3.971)
  Bottom Layer w0.5: v1(6.619,-3.971) 6.619,-48.021 12.065,-53.467 12.065,-55.499 ; R12.1@9.398,-61.214 9.716,-60.896 10.605,-60.896 12.065,-59.436 12.065,-55.499 ; JP2.1@10.16,-55.499 12.065,-55.499
DIP1: R9.1 S1.1 U1.32 | length 78.8
  Top Layer w0.25: v1(-1.862,2.329) -1.862,2.243 -0.75,1.131 U1.32@-0.75,-0.775
  Bottom Layer w0.5: v1(-1.862,2.329) -1.862,0.719 -1.27,0.127 3.81,0.127 4.66,0.127 4.953,-0.166 4.953,-50.546 -0.009,-55.508 -0.135,-55.508 -0.635,-56.008 S1.1@-0.635,-56.746 ; S1.1@-0.635,-56.508 -0.635,-60.54 -0.342,-60.833 2.286,-60.833 R9.1@2.54,-61.087